# EAGLE board Shield_Master (EAGLE 9.1.0)
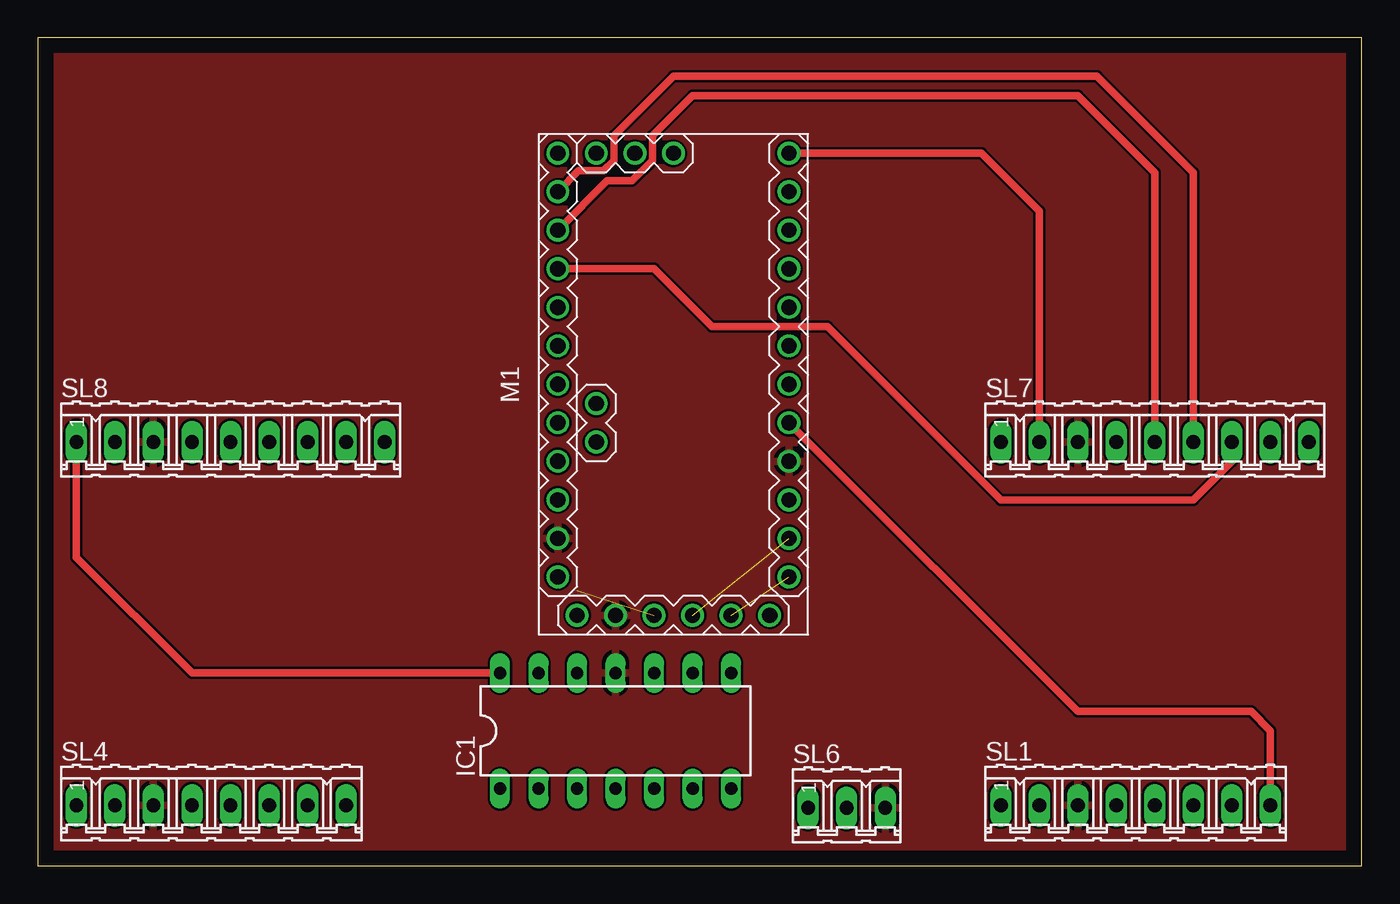
[diagram p0: board, top side]
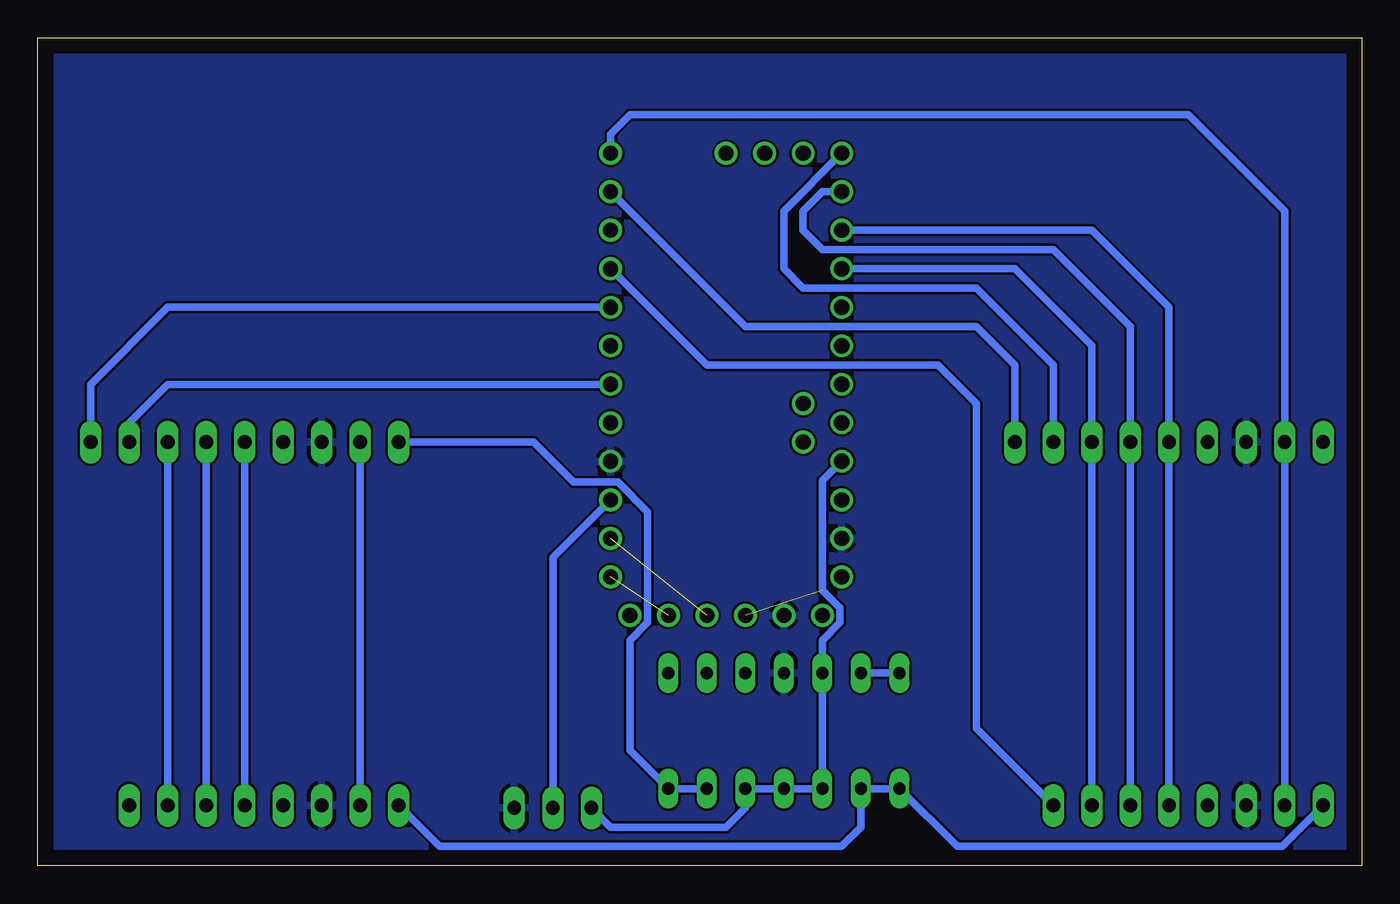
[diagram p1: board, bottom side, seen from below]

Size 87.3 x 54.6 mm. Coordinates in mm from the lower left corner, seen from the top.
Outline: 0,0 87.3,0 87.3,54.6 0,54.6 0,0
Copper layers (1*16): Top 0.035mm / dielectric 1.5mm / Bottom 0.035mm
Design rules "default": minimum track width 6mil, minimum drill 0.35mm, track to track 6mil, track to pad 6mil, pad to pad 6mil, via to via 6mil, smd to smd 6mil, copper to edge 40mil, drill to drill 6mil, minimum pad ring 10mil, minimum via ring 8mil, stop-mask expansion 4mil, vias tented up to drill 0mil, thermal gap 10mil

## Footprints (pad centres in the part's own frame; a part is rotated, then mirrored left to right if it is on the bottom)
DIL14 = drill 0.813 long: 1 -7.62,-3.81; 2 -5.08,-3.81; 3 -2.54,-3.81; 4 0,-3.81; 5 2.54,-3.81; 6 5.08,-3.81; 7 7.62,-3.81; 8 7.62,3.81; 9 5.08,3.81; 10 2.54,3.81; 11 0,3.81; 12 -2.54,3.81; 13 -5.08,3.81; 14 -7.62,3.81
ARDUINO-PRO-MINI = drill 1: J1.1 -15.24,6.35; J1.2 -15.24,3.81; J1.3 -15.24,1.27; J1.4 -15.24,-1.27; J1.5 -15.24,-3.81; J1.6 -15.24,-6.35; J2.1 -1.27,5.08; J2.2 -3.81,5.08; J3.1 15.24,0; J3.2 15.24,2.54; J3.3 15.24,5.08; J6.1 -12.7,7.62; J6.2 -10.16,7.62; J6.3 -7.62,7.62; J6.4 -5.08,7.62; J6.5 -2.54,7.62; J6.6 0,7.62; J6.7 2.54,7.62; J6.8 5.08,7.62; J6.9 7.62,7.62; J6.10 10.16,7.62; J6.11 12.7,7.62; J6.12 15.24,7.62; J7.1 15.24,-7.62; J7.2 12.7,-7.62; J7.3 10.16,-7.62; J7.4 7.62,-7.62; J7.5 5.08,-7.62; J7.6 2.54,-7.62; J7.7 0,-7.62; J7.8 -2.54,-7.62; J7.9 -5.08,-7.62; J7.10 -7.62,-7.62; J7.11 -10.16,-7.62; J7.12 -12.7,-7.62
08P = drill 0.914 long: 1 -8.89,0; 2 -6.35,0; 3 -3.81,0; 4 -1.27,0; 5 1.27,0; 6 3.81,0; 7 6.35,0; 8 8.89,0
03P = drill 0.914 long: 1 -2.54,0; 2 0,0; 3 2.54,0
09P = drill 0.914 long: 1 -10.16,0; 2 -7.62,0; 3 -5.08,0; 4 -2.54,0; 5 0,0; 6 2.54,0; 7 5.08,0; 8 7.62,0; 9 10.16,0

## Placement (x,y rotation side)
IC1  LM324N  [DIL14]  38.1,8.89 0 top
M1  ARDUINO-PRO-MINI-3.3V  [ARDUINO-PRO-MINI]  41.91,31.75 90 top
SL1  [08P]  72.39,3.97 0 top
SL4  [08P]  11.43,3.97 0 top
SL6  [03P]  53.34,3.81 0 top
SL7  [09P]  73.66,27.94 0 top
SL8  [09P]  12.7,27.94 0 top

## Library data of the parts
IC1 = linear
M1 = diy-modules
SL1 SL4 SL6-SL8 = con-amp-quick; OC_FARNELL: unknown; OC_NEWARK: unknown

## Nets
A0: M1.J6.8
A1: M1.J6.7
A2: M1.J6.6
A3: M1.J6.5
D2: M1.J7.8 SL1.8
D3: M1.J7.7 SL7.8
D4: M1.J7.6
D5: M1.J7.5 SL7.9
D06: M1.J7.4 SL4.8
D07: M1.J7.3
D08: M1.J7.2 SL8.9
D10: M1.J6.12 SL8.8
GND: IC1.11 M1.J1.2 M1.J6.2 M1.J7.9 SL1.3 SL4.3 SL6.3 SL7.3 SL8.3
MISO: M1.J6.10 SL1.5 SL4.5 SL7.5 SL8.5
MOSI: M1.J6.11 SL1.6 SL4.6 SL7.6 SL8.6
N$1: M1.J1.6
N$2: M1.J6.3
N$6: M1.J1.1
N$9: SL7.4
N$19: SL8.4
RAW: M1.J6.1
RESET: M1.J7.10 SL6.2
RST: M1.J7.1 SL1.2 SL4.2 SL7.2 SL8.2
RX: M1.J1.4 M1.J7.11
SCK: M1.J6.9 SL1.7 SL4.7 SL7.7 SL8.7
TX: M1.J1.5 M1.J7.12
VCC: IC1.3 IC1.4 IC1.5 IC1.12 M1.J1.3 M1.J6.4 SL6.1
VOUT: IC1.1 IC1.2 SL1.1 SL4.1
VOUT1: IC1.13 IC1.14 SL8.1
VOUT2: IC1.6 IC1.7 SL7.1

## Tracks (layer width: path | path; a pad name or v marks a point on that pad's centre or on a via)
D2
  Top 0.508: M1.J7.8 68.58,10.16 80.01,10.16 81.28,8.89 SL1.8
D3
  Bottom 0.508: SL7.8 81.28,29.21 78.74,31.75 M1.J7.7
D5
  Bottom 0.508: SL7.9 83.82,31.75 78.74,36.83 M1.J7.5
D06
  Bottom 0.508: SL4.8 25.4,9.05 25.4,30.48 27.94,33.02 43.18,33.02 M1.J7.4
D08
  Bottom 0.508: M1.J7.2 40.64,35.56 25.4,35.56 22.86,33.02 SL8.9
D10
  Bottom 0.508: SL8.8 20.32,33.02 25.4,38.1 36.83,38.1 38.1,39.37 38.1,43.18 M1.J6.12
GND
  pour Bottom: 0,54.61 0,0 86.36,0 86.36,54.61
  pour Top: 0,54.61 0,0 86.36,0 86.36,54.61
MISO
  Top 0.508: SL7.5 73.66,45.72 68.58,50.8 43.18,50.8 40.53,48.15 40.53,46.51 39.19,45.17 37.55,45.17 M1.J6.10
  Bottom 0.508: M1.J6.10 17.78,41.91 12.7,36.83 SL8.5 SL4.5 | SL7.5 SL1.5 73.66,3.81
MOSI
  Top 0.508: SL7.6 76.2,45.72 69.85,52.07 41.91,52.07 37.99,48.15 37.99,46.51 37.31,45.83 35.67,45.83 M1.J6.11
  Bottom 0.508: 14.99,3.97 SL4.6 SL8.6 15.24,35.56 20.32,40.64 35.56,40.64 36.83,41.91 36.83,43.18 35.56,44.45 M1.J6.11 | SL7.6 SL1.6
RESET
  Bottom 0.508: SL6.2 53.34,20.32 M1.J7.10
RST
  Top 0.508: SL7.2 66.04,43.18 62.23,46.99 M1.J7.1
  Bottom 0.508: M1.J7.1 49.53,48.26 48.26,49.53 11.43,49.53 5.08,43.18 SL8.2 SL4.2 | SL7.2 SL1.2
RX  (1 unrouted)
SCK
  Top 0.508: 52.07,35.56 63.5,24.13 76.2,24.13 78.74,26.67 SL7.7 | 52.07,35.56 | 52.07,35.56 44.45,35.56 40.64,39.37 M1.J6.9
  Bottom 0.508: M1.J6.9 22.86,39.37 17.78,34.29 SL8.7 SL4.7 | SL7.7 SL1.7 78.74,3.81
TX  (1 unrouted)
VCC  (1 unrouted)
  Bottom 0.508: M1.J6.4 35.56,25.4 35.56,18.15 34.4,16.99 34.4,16.03 35.56,14.87 IC1.12 IC1.3 IC1.4 IC1.5 40.64,3.81 41.91,2.54 49.53,2.54 SL6.1
VOUT
  Bottom 0.508: SL1.1 60.8,1.27 34.29,1.27 33.02,2.54 IC1.2 IC1.1 26.67,1.27 5.24,1.27 SL4.1
VOUT1
  Top 0.508: SL8.1 2.54,20.32 10.16,12.7 IC1.14
  Bottom 0.508: IC1.13 IC1.14
VOUT2
  Bottom 0.508: IC1.6 IC1.7 48.26,7.62 48.26,14.87 47.1,16.03 47.1,23.34 49.05,25.29 51.96,25.29 54.61,27.94 SL7.1